# Altium PCB Проект_ЕТЗ.PcbDoc
Units mm, origin at the board's own origin, x right, y up, seen from the top; angles counter-clockwise.
Board outline 153.83 x 76 mm, 2 copper layers (Top Layer, Bottom Layer), stack 1.536 mm thick; 34 components, 54 nets, 243 pads, 185 vias.
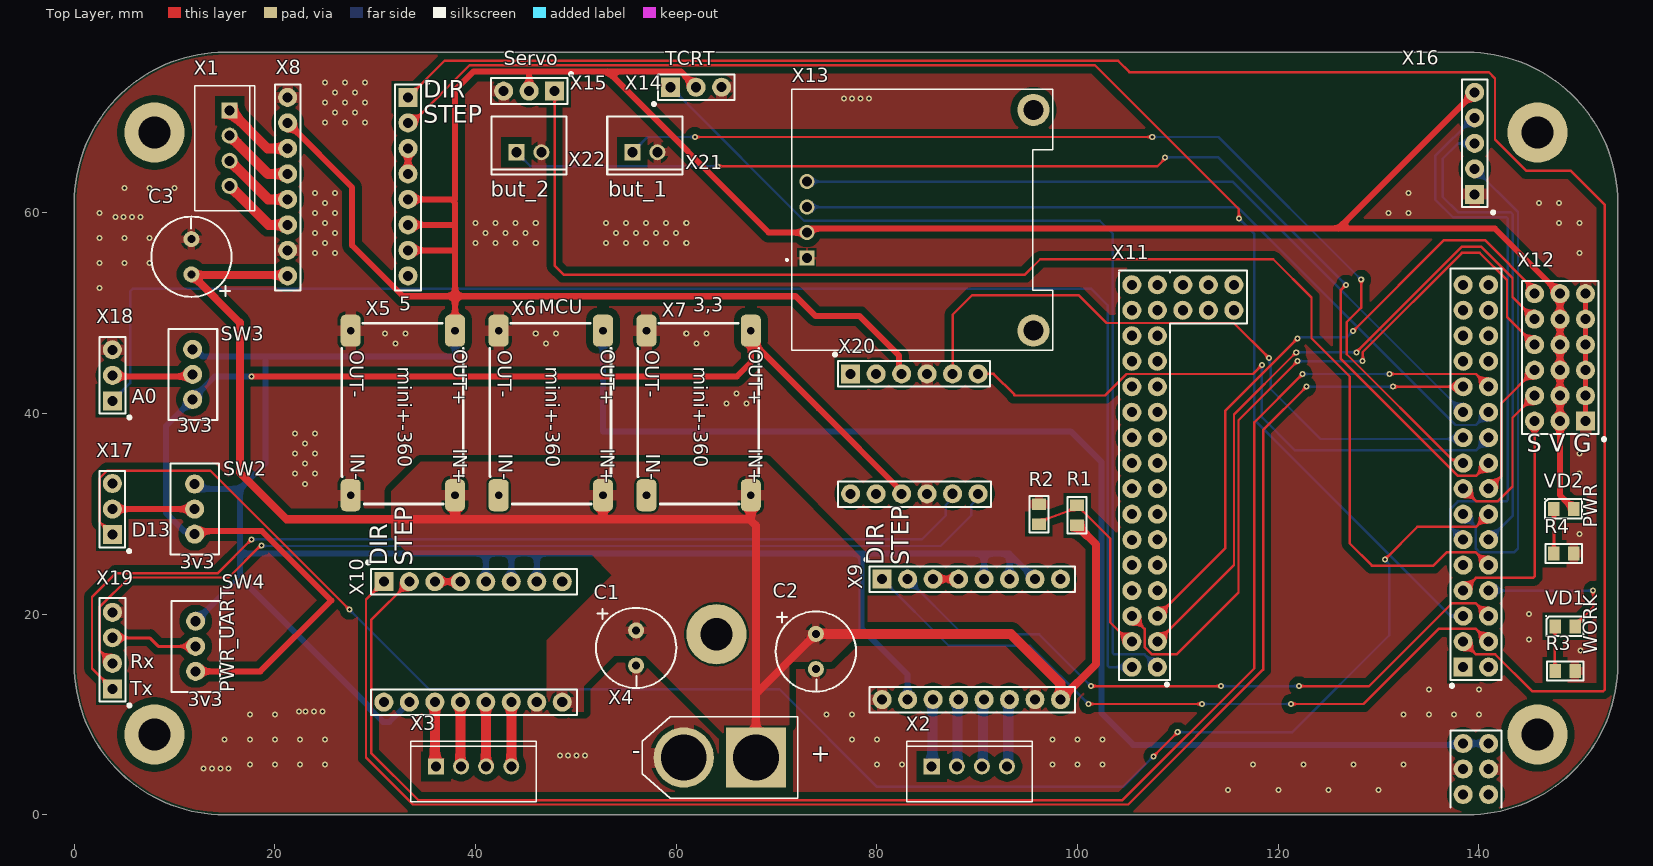
[diagram p0: Top Layer view]
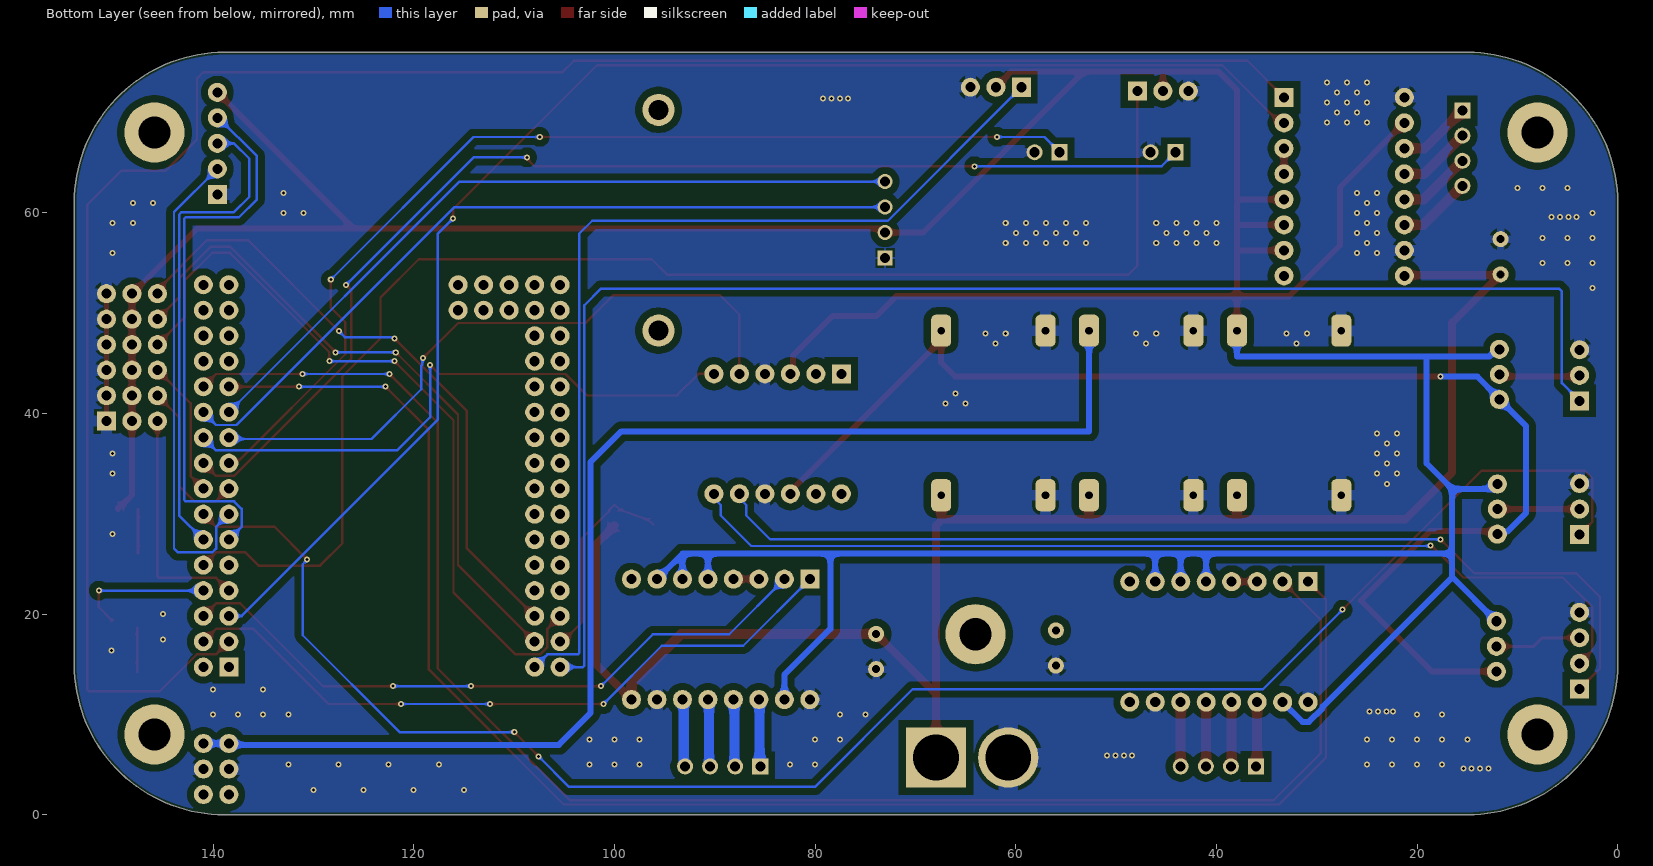
[diagram p1: Bottom Layer view, seen from below]

## Layer stack, top to bottom
Top Solder: solder mask 0.0254, SM-001, Dk 4
Top Layer: signal copper 0.018
Core: core 1.5, FR4 Tg135, Dk 4.5
Bottom Layer: signal copper 0.018
Board Layer Stack Bottom Solder: solder mask 0.0254, SM-001, Dk 4

## Board outline
15.006,0.006 cw(c15.006,15.006) 0.006,15.006 0.006,61.006 cw(c15.006,61.006) 15.006,76.006 138.834,76.006 cw(c138.834,61.006) 153.834,61.006 153.834,15.006 cw(c138.834,15.006) 138.834,0.006

## Design rules (kind name [scope] priority, off if disabled: settings)
AcuteAngle min_acute_angle [OnCopper] p1: minimum=3.50000000000000E+0001 checktracksonly=FALSE // Минимальный угол между примитивами топологии
BoardOutlineClearance board_outline_clearance_std [NOT (OnLayer('Bottom Overlay') OR OnLayer('Top Overlay'))] p1: gap=0.25 ignorepadtopadclearanceinfootprint=FALSE except(0: Arc-SplitContinuation Track-SplitContinuation SMDPad-SplitContinuation THPad-SplitContinuation Via-SplitContinuation Fill-SplitContinuation Poly-SplitContinuation Region-SplitContinuation Text-SplitContinuation) // Отступ элементов топологии от края фрезеруемой печатной платы
Clearance [InPolygonClass('TOP_GND', 'BOT_GND')] p1: gap=0.7 ignorepadtopadclearanceinfootprint=FALSE
Clearance clearance_outer_18um_std [OnTopLayer OR OnBottomLayer] p2: gap=0.2 ignorepadtopadclearanceinfootprint=TRUE // Зазоры на внешних слоях
Clearance clearance_inner_18um_std [NOT (OnTopLayer Or OnBottomLayer)] p3: gap=0.125 ignorepadtopadclearanceinfootprint=FALSE except(0.2: Arc-Fill Arc-Poly Track-Fill Track-Poly SMDPad-SMDPad SMDPad-Fill SMDPad-Poly THPad-Fill THPad-Poly Via-Fill Via-Poly Fill-Fill Fill-Poly Poly-Poly Poly-Region Poly-Text; 0.25: Arc-Hole Track-Hole SMDPad-Hole THPad-Hole Via-Hole Fill-Hole Poly-Hole Region-Hole Text-Hole) // Зазоры на внутренних слоях
ComponentClearance [All] p1: gap=0 collisioncheckmode=3 verticalgap=0 showdistances=FALSE
DiffPairsRouting diff_pairs_routing [All] p1: maxlimit=0.127 minlimit=0.127 mostfreqgap=0.127 toplayer_minwidth=0.143 toplayer_maxwidth=0.143 toplayer_prefwidth=0.143 bottomlayer_minwidth=0.143 bottomlayer_maxwidth=0.143 bottomlayer_prefwidth=0.143 impedanceprofiledriven=TRUE maxuncoupledlength=12.7 // Правила трассировки дифференциальных пар
HoleSize min_hole_size_std [IsPad] p1: absolutevalues=TRUE maxlimit=5.9 minlimit=0.6 maxpercent=80.000 minpercent=20.000 // Диаметр межслойного переходного отверстия
HoleSize min_hole_size_via_std [IsVia] p2: absolutevalues=TRUE maxlimit=5.9 minlimit=0.3 maxpercent=80.000 minpercent=20.000 // Минимальный диаметр монтажного отверстия
HoleToHoleClearance hole_to_hole_clearance_std [All] p1: gap=0.2 allowstackedmicrovias=FALSE // Минимальное расстояние между краями двух отверстий
MinimumAnnularRing min_via_ar_std [All] p1: minimumring=0.15 // Поясок площадки переходного отверстия (Annular ring VIA)
MinimumAnnularRing min_pad_ar_std [All] p2: minimumring=0.2 // Поясок монтажной контактной площадки (Annular ring PAD)
MinimumSolderMaskSliver min_solder_mask_bridge_std [All] p1: minsoldermaskwidth=0.15 // Мнимальная ширина масочного мостика
PlaneClearance plane_clearance_18um_std [All] p1: clearance=0.2 // Отступ полигона (для слоя plane) от элементов топологии
PlaneConnect [All] p1: planeconnectstyle=Relief reliefexpansion=0.5 reliefentries=4 reliefconductorwidth=0.2 reliefairgap=0.2
PolygonConnect poly_connect_to_pad<=0.3 [(AsMM(PadXSize_AllLayers)<=0.301) or (AsMM(PadYSize_AllLayers)<=0.301)] p1: thpad.connectstyle=Relief thpad.reliefconductorwidth=0.2 thpad.reliefentries=4 thpad.polygonreliefangle="90 Angle" thpad.airgapwidth=0.2 smdpad.connectstyle=Relief smdpad.reliefconductorwidth=0.2 smdpad.reliefentries=4 smdpad.polygonreliefangle="90 Angle" smdpad.airgapwidth=0.2 via.connectstyle=Direct via.reliefconductorwidth=0.254 via.reliefentries=4 via.polygonreliefangle="90 Angle" via.airgapwidth=0.254 // Правила подключения полигонов для падов от 0,3мм и меньше
PolygonConnect poly_connect_to_pad<=0.4 [(AsMM(PadXSize_AllLayers)<=0.401) or (AsMM(PadYSize_AllLayers)<=0.401)] p2: thpad.connectstyle=Relief thpad.reliefconductorwidth=0.26 thpad.reliefentries=4 thpad.polygonreliefangle="90 Angle" thpad.airgapwidth=0.2 smdpad.connectstyle=Relief smdpad.reliefconductorwidth=0.26 smdpad.reliefentries=4 smdpad.polygonreliefangle="90 Angle" smdpad.airgapwidth=0.2 via.connectstyle=Direct via.reliefconductorwidth=0.254 via.reliefentries=4 via.polygonreliefangle="90 Angle" via.airgapwidth=0.254 // Правила подключения полигонов для падов от 0,4 и меньше
PolygonConnect poly_connect_to_pad<=0.6 [(AsMM(PadXSize_AllLayers)<=0.601) or (AsMM(PadYSize_AllLayers)<=0.601)] p3: thpad.connectstyle=Relief thpad.reliefconductorwidth=0.33 thpad.reliefentries=4 thpad.polygonreliefangle="90 Angle" thpad.airgapwidth=0.2 smdpad.connectstyle=Relief smdpad.reliefconductorwidth=0.33 smdpad.reliefentries=4 smdpad.polygonreliefangle="90 Angle" smdpad.airgapwidth=0.2 via.connectstyle=Direct via.reliefconductorwidth=0.254 via.reliefentries=4 via.polygonreliefangle="90 Angle" via.airgapwidth=0.254 // Правила подключения полигонов для падов от 0,6мм и меньше
PolygonConnect poly_connect_to_pad<=0.7 [(AsMM(PadXSize_AllLayers)<=0.701) or (AsMM(PadYSize_AllLayers)<=0.701)] p4: thpad.connectstyle=Relief thpad.reliefconductorwidth=0.46 thpad.reliefentries=4 thpad.polygonreliefangle="90 Angle" thpad.airgapwidth=0.2 smdpad.connectstyle=Relief smdpad.reliefconductorwidth=0.46 smdpad.reliefentries=4 smdpad.polygonreliefangle="90 Angle" smdpad.airgapwidth=0.2 via.connectstyle=Direct via.reliefconductorwidth=0.254 via.reliefentries=4 via.polygonreliefangle="90 Angle" via.airgapwidth=0.254 // Правила подключения полигонов для падов от 0,7мм и меньше
PolygonConnect poly_connect_to_pad<=0.8 [(AsMM(PadXSize_AllLayers)<=0.8)or(AsMM(PadYSize_AllLayers)<=0.8)] p5: thpad.connectstyle=Relief thpad.reliefconductorwidth=0.53 thpad.reliefentries=4 thpad.polygonreliefangle="90 Angle" thpad.airgapwidth=0.3 smdpad.connectstyle=Relief smdpad.reliefconductorwidth=0.53 smdpad.reliefentries=4 smdpad.polygonreliefangle="90 Angle" smdpad.airgapwidth=0.2 via.connectstyle=Direct via.reliefconductorwidth=0.254 via.reliefentries=4 via.polygonreliefangle="90 Angle" via.airgapwidth=0.254 // Правила подключения полигонов для падов от 0,8мм и меньше
PolygonConnect poly_connect_to_pad<=1 [(AsMM(PadXSize_AllLayers)<=1.01)or(AsMM(PadYSize_AllLayers)<=1.01)] p6: thpad.connectstyle=Relief thpad.reliefconductorwidth=0.6 thpad.reliefentries=4 thpad.polygonreliefangle="90 Angle" thpad.airgapwidth=0.3 smdpad.connectstyle=Relief smdpad.reliefconductorwidth=0.6 smdpad.reliefentries=4 smdpad.polygonreliefangle="90 Angle" smdpad.airgapwidth=0.2 via.connectstyle=Direct via.reliefconductorwidth=0.254 via.reliefentries=4 via.polygonreliefangle="90 Angle" via.airgapwidth=0.254 // Правила подключения полигонов для падов от 1мм и меньше
PolygonConnect poly_connect_to_pad<=1.3 [(AsMM(PadXSize_AllLayers)<=1.31)or(AsMM(PadYSize_AllLayers)<=1.31)] p7: thpad.connectstyle=Relief thpad.reliefconductorwidth=0.66 thpad.reliefentries=4 thpad.polygonreliefangle="90 Angle" thpad.airgapwidth=0.3 smdpad.connectstyle=Relief smdpad.reliefconductorwidth=0.86 smdpad.reliefentries=4 smdpad.polygonreliefangle="90 Angle" smdpad.airgapwidth=0.2 via.connectstyle=Direct via.reliefconductorwidth=0.254 via.reliefentries=4 via.polygonreliefangle="90 Angle" via.airgapwidth=0.254 // Правила подключения полигонов для падов от 1,3мм и меньше
PolygonConnect poly_connect_to_pad<=1.6 [(AsMM(PadXSize_AllLayers)<=1.61)or(AsMM(PadYSize_AllLayers)<=1.61)] p8: thpad.connectstyle=Relief thpad.reliefconductorwidth=0.8 thpad.reliefentries=4 thpad.polygonreliefangle="90 Angle" thpad.airgapwidth=0.3 smdpad.connectstyle=Relief smdpad.reliefconductorwidth=1 smdpad.reliefentries=4 smdpad.polygonreliefangle="90 Angle" smdpad.airgapwidth=0.2 via.connectstyle=Direct via.reliefconductorwidth=0.254 via.reliefentries=4 via.polygonreliefangle="90 Angle" via.airgapwidth=0.254 // Правила подключения полигонов для падов от 1,6мм и меньше
PolygonConnect poly_connect_to_pad<=1.8 [(AsMM(PadXSize_AllLayers)<=1.8)or(AsMM(PadYSize_AllLayers)<=1.8)] p9: thpad.connectstyle=Relief thpad.reliefconductorwidth=1 thpad.reliefentries=4 thpad.polygonreliefangle="90 Angle" thpad.airgapwidth=0.3 smdpad.connectstyle=Relief smdpad.reliefconductorwidth=1.2 smdpad.reliefentries=4 smdpad.polygonreliefangle="90 Angle" smdpad.airgapwidth=0.2 via.connectstyle=Direct via.reliefconductorwidth=0.254 via.reliefentries=4 via.polygonreliefangle="90 Angle" via.airgapwidth=0.254 // Правила подключения полигонов для падов от 1,8мм и меньше
PolygonConnect poly_connect_to_pad<=2 [(AsMM(PadXSize_AllLayers)<=2.01)or(AsMM(PadYSize_AllLayers)<=2.01)] p10: thpad.connectstyle=Relief thpad.reliefconductorwidth=1.1 thpad.reliefentries=4 thpad.polygonreliefangle="90 Angle" thpad.airgapwidth=0.3 smdpad.connectstyle=Relief smdpad.reliefconductorwidth=1.4 smdpad.reliefentries=4 smdpad.polygonreliefangle="90 Angle" smdpad.airgapwidth=0.2 via.connectstyle=Direct via.reliefconductorwidth=0.254 via.reliefentries=4 via.polygonreliefangle="90 Angle" via.airgapwidth=0.254 // Правила подключения полигонов для падов от 2мм и меньше
PolygonConnect poly_connect_to_pad<=2.3 [(AsMM(PadXSize_AllLayers)<=2.31)or(AsMM(PadYSize_AllLayers)<=2.31)] p11: thpad.connectstyle=Relief thpad.reliefconductorwidth=1.2 thpad.reliefentries=4 thpad.polygonreliefangle="90 Angle" thpad.airgapwidth=0.3 smdpad.connectstyle=Relief smdpad.reliefconductorwidth=1.4 smdpad.reliefentries=4 smdpad.polygonreliefangle="90 Angle" smdpad.airgapwidth=0.2 via.connectstyle=Direct via.reliefconductorwidth=0.254 via.reliefentries=4 via.polygonreliefangle="90 Angle" via.airgapwidth=0.254 // Правила подключения полигонов для падов от 2,3мм и меньше
PolygonConnect poly_connect_to_pad<=2.5 [(AsMM(PadXSize_AllLayers)<=2.51)or(AsMM(PadYSize_AllLayers)<=2.51)] p12: thpad.connectstyle=Relief thpad.reliefconductorwidth=1.2 thpad.reliefentries=4 thpad.polygonreliefangle="90 Angle" thpad.airgapwidth=0.3 smdpad.connectstyle=Relief smdpad.reliefconductorwidth=1.4 smdpad.reliefentries=4 smdpad.polygonreliefangle="90 Angle" smdpad.airgapwidth=0.2 via.connectstyle=Direct via.reliefconductorwidth=0.254 via.reliefentries=4 via.polygonreliefangle="90 Angle" via.airgapwidth=0.254 // Правила подключения полигонов для падов от 2,5мм и меньше
PolygonConnect poly_connect_to_pad<=2.7 [(AsMM(PadXSize_AllLayers)<=2.71)or(AsMM(PadYSize_AllLayers)<=2.71)] p13: thpad.connectstyle=Relief thpad.reliefconductorwidth=1.4 thpad.reliefentries=4 thpad.polygonreliefangle="90 Angle" thpad.airgapwidth=0.3 smdpad.connectstyle=Relief smdpad.reliefconductorwidth=1.6 smdpad.reliefentries=4 smdpad.polygonreliefangle="90 Angle" smdpad.airgapwidth=0.2 via.connectstyle=Direct via.reliefconductorwidth=0.254 via.reliefentries=4 via.polygonreliefangle="90 Angle" via.airgapwidth=0.254 // Правила подключения полигонов для падов от 2,7мм и меньше
PolygonConnect poly_connect_to_pad<=3 [(AsMM(PadXSize_AllLayers)<=3.01)or(AsMM(PadYSize_AllLayers)<=3.01)] p14: thpad.connectstyle=Relief thpad.reliefconductorwidth=1.6 thpad.reliefentries=4 thpad.polygonreliefangle="90 Angle" thpad.airgapwidth=0.3 smdpad.connectstyle=Relief smdpad.reliefconductorwidth=1.8 smdpad.reliefentries=4 smdpad.polygonreliefangle="90 Angle" smdpad.airgapwidth=0.2 via.connectstyle=Direct via.reliefconductorwidth=0.254 via.reliefentries=4 via.polygonreliefangle="90 Angle" via.airgapwidth=0.254 // Правила подключения полигонов для падов от 3мм и меньше
PolygonConnect poly_connect_to_pad<=7 [(AsMM(PadXSize_AllLayers)<7.01)or(AsMM(PadYSize_AllLayers)<=7.01)] p15: thpad.connectstyle=Relief thpad.reliefconductorwidth=2 thpad.reliefentries=4 thpad.polygonreliefangle="90 Angle" thpad.airgapwidth=0.4 smdpad.connectstyle=Relief smdpad.reliefconductorwidth=2 smdpad.reliefentries=4 smdpad.polygonreliefangle="90 Angle" smdpad.airgapwidth=0.3 via.connectstyle=Direct via.reliefconductorwidth=0.254 via.reliefentries=4 via.polygonreliefangle="90 Angle" via.airgapwidth=0.254 // Правила подключения полигонов для падов от 7мм и меньше
PolygonConnect poly_connect_to_pad [All] p16: thpad.connectstyle=Relief thpad.reliefconductorwidth=0.25 thpad.reliefentries=4 thpad.polygonreliefangle="90 Angle" thpad.airgapwidth=0.2 smdpad.connectstyle=Relief smdpad.reliefconductorwidth=0.25 smdpad.reliefentries=4 smdpad.polygonreliefangle="90 Angle" smdpad.airgapwidth=0.2 via.connectstyle=Direct via.reliefconductorwidth=0.25 via.reliefentries=4 via.polygonreliefangle="90 Angle" via.airgapwidth=0.2 // Правила подключения полигонов общие
RoutingCorners [All] p1 off: cornerstyle=45-Degree minsetback=2.5 maxsetback=2.5
RoutingVias [All] p1: holewidth=0.3 width=0.6 viastyle="Through Hole" minholewidth=0.3 minwidth=0.6 maxholewidth=5.9 maxwidth=6.4
SilkToSilkClearance silk_to_silk_clearance_std [All] p1 off: silktosilkclearance=0.15 // Отступ текста шелкографии от других примитивов шелкографии
SilkToSolderMaskClearance silk_to_solder_mask_clearance_std [IsPad] p1 off: minsilkscreentomaskgap=0.15 clearancetoexposedcopper=FALSE // Минимальное расстояние между элементами шелкографии и вскрытой медью
SolderMaskExpansion solder_mask_expansion_std [All] p1: expansion=0.05 istentingtop=FALSE // Припуск паяльной масски
SupplyNets "Schematic Supply Nets_5" [InNet('+3,3В')] p1: voltage=0.000
SupplyNets "Schematic Supply Nets_4" [InNet('+5В_MCU')] p2: voltage=0.000
SupplyNets "Schematic Supply Nets_2" [InNet('+5В')] p3: voltage=0.000
SupplyNets "Schematic Supply Nets_1" [InNet('GND')] p4: voltage=0.000
SupplyNets "Schematic Supply Nets" [InNet('VCC')] p5: voltage=0.000
UnRoutedNet [All] p1: checkbadconnections=TRUE
Width width_18um_std [All] p1: maxlimit=10 minlimit=0.125 preferedwidth=0.15 checkconnectedcopper=TRUE // Ширина проводников (общая)
19 further rules are at their usual default settings.

## Classes and differential pairs
polygon class TOP_GND: BOT_GND TOP_GND

## Components (designator, comment, footprint, x,y, rotation, side; value= is the part's Value field where it differs from the comment)
C1 "am" SK050M0100B3F-0811-UP 56.007,16.637 r90 top
C2 "am" SK050M0100B3F-0811-UP 73.914,16.284 r90 top
C3 "am" SK050M0100B3F-0811-UP 11.684,55.626 r270 top
R1 "1,2к" Resistor0805 99.949,29.845 r90 top
R2 "4,75к" Resistor0805 96.139,29.972 r90 top
R3 "220" Resistor0805 148.59,14.351 r0 top
R4 "220" Resistor0805 148.463,26.035 r0 top
SW2 "кнопка_S" SS-12D00G3 12.002,30.48 r90 top
SW3 "кнопка_S" SS-12D00G3 11.811,43.902 r90 top locked
SW4 "кнопка_S" SS-12D00G3 12.1,16.8 r90 top
VD1 "LED0805" LED0805 148.603,18.796 r0 top
VD2 "LED0805" LED0805 148.463,30.48 r0 top
X1 "DS1069-4M (CWF-4)" CWF-4 15.494,70.191 r0 top
X2 "DS1069-4M (CWF-4)" CWF-4 85.464,4.826 r90 top
X3 "DS1069-4M (CWF-4)" CWF-4 36.061,4.826 r90 top
X4 "XT60-M" AMASS_XT60-M 64.345,5.715 r180 top
X5 "mini-360" MINI360 37.959,48.26 r270 top
X6 "mini-360" MINI360 52.698,48.26 r270 top
X7 "mini-360" MINI360 67.437,48.26 r270 top
X8 "A4988" A4988 33.269,68.966 r270 top
X9 "A4988" A4988 83.058,23.495 r0 top
X10 "A4988" A4988 33.401,23.241 r0 top
X11 "Arduino Mega 2560 Pro" PBD38 106.68,17.272 r90 top
X12 "PLS-2.54-3*6" PLS-2.54-3*6 145.542,39.243 r90 top
X13 "PLS-2.54-4" "oled 128x64 0.96inch" 97.631,46.303 r90 top
X14 "PLS-2.54-3" PLS-2.54-3 61.976,72.517 r0 top
X15 "PLS-2.54-3" PLS-2.54-3 45.339,72.141 r180 top
X16 "PLS-2.54-5" KY-040 139.573,68.199 r90 top
X17 "PLS-2.54-3" PLS-2.54-3 3.81,30.48 r90 top
X18 "PLS-2.54-3" PLS-2.54-3 3.815,43.81 r90 top
X19 "PLS-2.54-4" PLS-2.54-4 3.815,15.108 r90 top
X20 "LOGIC CONVENTTOR" "LOGIC CONVENTOR" 79.92,43.95 r0 top
X21 "DS1069-2M (CWF-2)" CWF-2 56.876,66.715 r0 top
X22 "DS1069-2M (CWF-2)" CWF-2 45.319,66.715 r0 top

## Footprints (in the part's own frame and the unit in brackets; to place one, negate y for a bottom-side part, rotate by r counter-clockwise, add the part's x,y. Pads: shape width x height; smd on the part's side, far side on the other; paste and mask are expansions set on the pad)
A4988 [mm]
  rect 1.9x1.9 hole 1: 1(-2.54,0)
  round 1.9 hole 1: 2(0,0) 3(2.545,0.005) 4(5.08,0) 5(7.62,0) 6(10.16,0) 7(12.7,0) 8(15.24,0) 9(-2.54,-12) 10(0,-12) 11(2.545,-11.995) 12(5.08,-12) 13(7.62,-12) 14(10.16,-12) 15(12.7,-12) 16(15.24,-12)
  silkscreen extent -4.1,-13.28 16.7,1.94, body extent -3.8,-13.55 16.67,1.45, height 15.6
AMASS_XT60-M [mm]
  rect 6x6 / inner round 6 / far side rect 6x6 hole 4.55: 1(-3.6,0)
  round 6 hole 4.55: 2(3.6,0)
  silkscreen extent -7.75,-4.05 7.75,4.05, body extent -7.75,-4.05 7.75,4.05, height 16
CWF-2 [mm]
  rect 1.6x1.6 hole 1: 1(-1.25,-0.675)
  round 1.6 hole 1: 2(1.25,-0.675)
  silkscreen extent -3.75,-2.88 3.75,2.88, body extent -3.75,-2.87 3.75,2.88, height 7
CWF-4 [mm]
  rect 1.6x1.6 hole 1: 1(0,0)
  round 1.6 hole 1: 2(0,-2.5) 3(0,-5) 4(0,-7.5)
  silkscreen extent -3.5,-10 2.5,2.5, body extent -3.55,-9.95 2.2,2.45, height 7
KY-040 [mm]
  round 1.9 hole 1 mask+0.102: 1(3.81,0) 2(1.27,0)
  round 1.9 hole 1: 3(-1.27,0) 4(-3.81,0)
  rect 1.9x1.9 hole 1: 5(-6.35,0)
  silkscreen extent -8.16,-1.85 5.1,1.27, body extent -7.57,-1.27 7.67,7.35, height 5.45
LED0805 [mm]
  rect 1.15x1.4 smd: 1(-1,0) 2(1,0)
  silkscreen extent -1.9,-0.95 1.82,1.03, body extent -1.01,-0.65 1.01,0.6, height 1.1
"LOGIC CONVENTOR" [mm]
  rect 1.9x1.9 hole 1: 1(-2.54,0)
  round 1.9 hole 1: 2(0,0) 3(2.545,0.005) 4(5.08,0) 5(7.62,0) 6(10.16,0) 7(-2.54,-11.95) 8(0,-11.95) 9(2.545,-11.95) 10(5.08,-11.95) 11(7.62,-11.945) 12(10.16,-11.95)
  silkscreen extent -4.1,-13.28 11.48,1.94, body extent -3.75,-13.25 11.49,1.27, height 8.5
MINI360 [mm]
  rrect50% 3.2x2 hole 0.762: 1(0,0) 2(0,-10.4) 3(16.4,0) 4(16.4,-10.4)
  silkscreen extent -0.75,-11.27 17.27,0.8, body extent -0.73,-11.23 17.27,0.77, height 3.75
"oled 128x64 0.96inch" [mm]
  round 1.508 hole 1: 1(16.816,24.606) 2(14.276,24.606) 3(11.736,24.606)
  rect 1.508x1.508 / inner round 1.508 / far side rect 1.508x1.508 hole 1: 4(9.196,24.606)
  silkscreen extent 0.01,0.11 26.01,26.71, body extent 0.01,0.11 26.01,26.11, height 5.66
PBD38 [mm]
  rect 1.9x1.9 hole 1: 1(-2.54,-31.75)
  round 1.9 hole 1: 2(-2.54,-34.29) 3(0,-31.75) 7(5.08,-31.75) 8(5.08,-34.29) 13(12.7,-31.75) 14(12.7,-34.29) 19(20.32,-31.75) 20(20.32,-34.29) 25(27.94,-31.75) 26(27.94,-34.29) 31(35.56,-31.75) 32(35.56,-34.29) 33(17.78,1.27) 34(17.78,-1.27) 35(20.32,1.27) 39(25.4,1.27) 40(25.4,-1.27) 45(33.02,1.27) 46(33.02,-1.27) 51(35.56,-6.35) 52(33.02,-6.35) 57(0,1.27) 58(0,-1.27) 63(7.62,1.27) 64(7.62,-1.27) 69(15.24,1.27) 70(15.24,-1.27) 71(-15.24,-34.285) 72(-15.24,-31.745) 73(-12.7,-34.285)
  round 1.9 hole 1 mask+0.102: 4(0,-34.29) 5(2.54,-31.75) 6(2.54,-34.29) 9(7.62,-31.75) 10(7.62,-34.29) 11(10.16,-31.75) 12(10.16,-34.29) 15(15.24,-31.75) 16(15.24,-34.29) 17(17.78,-31.75) 18(17.78,-34.29) 21(22.86,-31.75) 22(22.86,-34.29) 23(25.4,-31.75) 24(25.4,-34.29) 27(30.48,-31.75) 28(30.48,-34.29) 29(33.02,-31.75) 30(33.02,-34.29) 36(20.32,-1.27) 37(22.86,1.27) 38(22.86,-1.27) 41(27.94,1.27) 42(27.94,-1.27) 43(30.48,1.27) 44(30.48,-1.27) 47(35.56,1.27) 48(35.56,-1.27) 49(35.56,-3.81) 50(33.02,-3.81) 53(35.56,-8.89) 54(33.02,-8.89) 55(-2.54,1.27) 56(-2.54,-1.27) 59(2.54,1.27) 60(2.54,-1.27) 61(5.08,1.27) 62(5.08,-1.27) 65(10.146,1.257) 66(10.16,-1.27) 67(12.7,1.27) 68(12.7,-1.27) 74(-12.7,-31.745) 75(-10.16,-34.285) 76(-10.16,-31.745)
  silkscreen extent -16.52,-35.57 37.2,2.54, body extent -17.18,-35.6 36.94,2.5, height 13.94
PLS-2.54-3 [mm]
  rect 1.9x1.9 hole 1: 1(-2.54,0)
  round 1.9 hole 1: 2(0,0) 3(2.545,0.005)
  silkscreen extent -4.2,-1.68 3.81,1.27, body extent -3.81,-1.27 3.81,1.27, height 8.59
PLS-2.54-3*6 [mm]
  rect 1.9x1.9 hole 1: 1(0,-5.08)
  round 1.9 hole 1: 2(2.54,-5.08) 3(5.08,-5.08) 4(7.62,-5.08) 5(10.16,-5.08) 6(12.7,-5.08) 7(0,-2.54) 8(2.54,-2.54) 9(5.08,-2.54) 10(7.62,-2.54) 11(10.16,-2.54) 12(12.7,-2.54) 13(0,0) 14(2.54,0) 15(5.08,0) 16(10.16,0) 17(7.62,0) 18(12.7,0)
  silkscreen extent -1.81,-6.93 13.97,1.27, body extent -1.26,-6.35 13.98,1.27, height 8.54
PLS-2.54-4 [mm]
  rect 1.9x1.9 hole 1: 1(-2.54,0)
  round 1.9 hole 1: 2(0,0) 3(2.545,0.005) 4(5.08,0)
  silkscreen extent -4.2,-1.68 6.5,1.27, body extent -3.79,-1.37 6.37,1.17, height 8.6
Resistor0805 [mm]
  rect 1.15x1.4 smd: 1(-1,0) 2(1,0)
  silkscreen extent -1.82,-0.95 1.82,0.95, body extent -1.1,-0.7 1.1,0.7, height 0.45
SK050M0100B3F-0811-UP [mm]
  round 1.6 hole 0.8: 1(-1.75,0) 2(1.75,0)
  silkscreen extent -4,-4 4,4, body extent -4,-3.99 4,3.99, height 11.5
SS-12D00G3 [mm]
  round 1.9 hole 1: 1(-2.5,0) 2(0,0)
  round 1.9 hole 1 mask+0.102: 3(2.5,0)
  silkscreen extent -4.54,-2.45 4.53,2.42, body extent -4.31,-1.85 4.31,2, height 7.45

## Part data
C1 C2 C3: library part CAPATION+470мк35В, voltage=35В, nam=конденсатор, nominal=100мк
R1 R2 R3 R4: library part RESISTOR, nam=резистор
SW2 SW3 SW4: library part BT992895, "крутые переключатели с бимов", nam=кнопка_S
X1 X2 X3: library part CWF-4, "Разъем - 4 конт. прямая вилка на плату", Contact_1=1B, Contact_2=1A, Contact_3=2A, Contact_4=2B, Name="DS1069-4M (CWF-4)"
X4: "Plug; DC supply; XT60; male; PIN: 2; for cable; soldered; 30A; 500V", Package=Package, Check_prices=https://www.snapeda.com/parts/XT60-M/AMASS/view-part/?ref=eda, Contact_1=+4S, Contact_2=GND, MF=AMASS, MP=XT60-M, SnapEDA_Link=https://www.snapeda.com/parts/XT60-M/AMASS/view-part/?ref=snap
X5 X6 X7: library part mini360, "стаб 18 на 12 мм"
X16: library part Ky-040
X21 X22: library part CWF-2, "Разъем - 2 конт. прямая вилка на плату", Contact_1=Contact_1, Contact_2=Contact_2, Name="DS1069-2M (CWF-2)"
X11: nam="Arduino Mega 2560 Pro"
X12: Contact_1=GND, Contact_2=GND, Contact_3=GND, Contact_4=GND, Contact_5=GND, Contact_6=GND, Contact_7=VCC, Contact_8=VCC, Contact_9=VCC, Contact_10=VCC, Contact_11=VCC, Contact_12=VCC, Contact_13=D1, Contact_14=D2, Contact_15=D3, Contact_16=A1, Contact_17=A2, Contact_18=A3
X13: Contact_1=SDA, Contact_2=SCL, Contact_3=VCC, Contact_4=GND
X14 X15 X17 X18: Contact_1=S, Contact_2=VCC, Contact_3=GND, nam="для датчиков"
X19: Contact_1=TX, Contact_2=RX, Contact_3=VCC, Contact_4=GND

## Free pads (board coordinates)
  round 6 hole 3.2: 2(8.006,8.006) 2(8.006,68.006) 2(64.006,18.006) 2(145.834,8.006) 2(145.834,68.006)
  round 3.2 hole 2: 2(95.599,48.263) 2(95.599,70.263)

## Via types
v1: diameter 0.6, hole 0.3, Top Layer to Bottom Layer, tented both sides, 185 vias

## Nets (pads, with @x,y where several pads share a name; then routed paths per layer and width w, separated by ;. In a path a pad name is that pad's centre, name@x,y a point inside that pad or via, vN(x,y) a via of type N, cw(c..) or ccw(c..) an arc to the next point about the centre after c; other vN are vias at no path point)
+3,3В: SW2.1 SW3.1 SW4.1 X7.1 X20.9 | length 130.6
  Top Layer w0.6: SW4.1 18.554,14.3 25.622,21.368 18.72,28.27 SW2.1@12.212,28.27 ; v1(17.653,43.688) 66.04,43.688 67.437,45.085 X7.1@67.437,47.263 ; X7.1 X7.1@67.437,47.263 ; X20.9@82.417,32.283 74.185,40.515 68.014,46.686 68.014,46.975 67.726,47.263 X7.1@67.437,47.263
  Bottom Layer w0.6: SW2.1 11.753,28.229 11.014,28.229 9.144,30.099 9.144,38.75 12.002,41.607 12.002,41.688 14.001,43.688 v1(17.653,43.688)
+5В: SW2.3 SW3.3 SW4.3 VD2.2 X5.1 X8.5 X8.6 X8.7 X8.10 X9.5 X9.6 X9.7 X9.10 X10.5 X10.6 X10.7 X10.10 X12.7 X12.8 X12.9 X12.10 X12.11 X12.12 X13.3 X14.2 X15.2 X16.1 X20.3 | length 483.2
  Top Layer w0.6: X8.10 27.686,62.549 27.686,56.769 32.766,51.689 37.959,51.689 ; X8.7 37.837,56.266 37.959,56.388 ; X8.6 37.954,58.806 37.959,58.801 ; X8.5 37.602,61.346 ; X5.1 37.959,51.689 ; X15.2@45.339,72.644 45.339,73.893 ; X14.2 60.886,73.607 60.886,73.674 60.466,74.094 53.16,74.094 ; X20.3 82.216,44.204 82.216,45.759 78.275,49.7 73.893,49.7 71.904,51.689 37.959,51.689 ; X16.1 125.984,58.42 ; VD2.2 149.463,30.605 149.188,30.88 149.063,30.88 148.082,31.861 X12.7 X12.8 X12.9 X12.10 X12.11 X12.12 141.605,58.42 125.984,58.42 ; 37.602,61.346 37.959,60.99 37.959,58.801 ; 37.602,61.346 37.973,61.346 37.973,72.263 39.804,74.094 53.16,74.094 ; 37.959,51.689 37.959,56.388 ; 37.959,56.388 37.959,58.801 ; 53.16,74.094 69.215,58.039 X13.3 73.271,58.039 73.652,58.42 125.984,58.42
  Bottom Layer w0.6: SW3.3 12.098,46.402 12.812,45.688 37.959,45.688 ; SW2.3@12.002,32.48 16.51,32.48 ; SW4.3 16.51,23.71 16.51,26.035 ; 16.51,23.684 29.411,10.783 29.411,10.64 30.786,9.266 31.426,9.266 X10.10 ; 19.05,45.628 19.05,35.02 16.51,32.48 ; 37.959,45.748 X5.1 ; X10.5 41.021,26.035 ; X10.6 43.561,26.035 ; X10.7 46.101,26.035 ; X9.10 83.058,13.97 78.486,18.542 78.486,26.035 ; X9.5 90.678,26.035 ; X9.6 93.218,26.035 ; X9.7 93.218,26.035 ; 16.51,26.035 41.021,26.035 ; 16.51,26.035 16.51,32.48 ; 41.021,26.035 43.561,26.035 ; 43.561,26.035 46.101,26.035 ; 46.101,26.035 78.486,26.035 ; 78.486,26.035 90.678,26.035 ; 90.678,26.035 93.218,26.035
+5В_MCU: X6.1 X11.75 X11.76 | length 126
  Bottom Layer w0.6: X6.1 52.698,38.227 99.314,38.227 102.362,35.179 102.362,10.16 105.537,6.985 138.425,6.985 X11.76 X11.75
Analog: X11.55 X18.1 | length 148.2
  Bottom Layer w0.24: X18.1 5.574,43.029 5.574,52.17 5.856,52.451 101.343,52.451 102.997,50.797 102.997,14.873 103.138,14.732 X11.55
BATTERY_VOLTAGE: R1.2 R2.1 X11.57 | length 20.4
  Top Layer w0.24: R2.1 96.719,29.427 99.369,30.39 R1.2 100.074,30.845 100.529,30.39 100.529,30.265 103.251,27.543 103.251,19.177 105.156,17.272 X11.57
But1: X11.17 X21.1 | length 103.3
  Top Layer w0.24: v1(61.849,67.564) v1(107.442,67.564) ; v1(128.27,53.34) 128.27,50.555 126.831,49.115 126.831,45.902 137.369,35.363 138.119,35.363 X11.17
  Bottom Layer w0.24: X21.1 57.15,67.564 v1(61.849,67.564) ; v1(107.442,67.564) 114.046,67.564 v1(128.27,53.34)
But2: X11.18 X22.1 | length 116.7
  Top Layer w0.24: v1(64.135,64.643) 107.95,64.643 v1@108.839,65.532 ; v1(126.746,52.832) 126.238,52.324 126.238,45.448 137.904,33.782 139.7,33.782 X11.18
  Bottom Layer w0.24: X22.1 45.466,64.643 v1(64.135,64.643) ; v1(108.712,65.532) 114.046,65.532 v1@126.714,52.864
Digital: X11.14 X17.1 | length 174.2
  Top Layer w0.24: X17.1 2.535,29.215 2.535,33.551 3.279,34.295 13.584,34.295 v1(27.432,20.447) ; v1(107.569,5.842) v1(109.982,8.255) ; v1(130.626,25.47) 133.858,28.702 139.7,28.702 X11.14
  Bottom Layer w0.24: v1(27.432,20.447) 35.363,12.516 70.288,12.516 80.01,2.794 104.521,2.794 v1(107.569,5.842) ; v1(109.982,8.255) 121.412,8.255 131.064,17.907 131.064,24.975 130.626,25.413 v1(130.626,25.47)
Dir1: X8.1 X11.3 | length 194.8
  Top Layer w0.24: X8.1 36.917,75.154 104.043,75.154 105.17,74.027 140.984,74.027 141.605,73.406 141.605,67.31 144.728,64.187 149.173,64.187 152.527,60.833 152.527,12.476 152.386,12.335 145.288,12.335 141.621,16.002 139.7,16.002 X11.3
Dir2: X9.1 X11.4 | length 69.2
  Top Layer w0.24: v1(101.092,11.049) v1(112.395,11.049) ; v1(121.285,11.049) 128.493,11.049 135.986,18.542 139.7,18.542 X11.4
  Bottom Layer w0.24: X9.1 87.156,16.857 95.284,16.857 v1(101.092,11.049) ; v1(112.395,11.049) v1(121.285,11.049)
Dir3: X10.1 X11.23 | length 160.8
  Top Layer w0.24: X10.1 29.083,21.463 29.083,5.715 33.766,1.032 105.045,1.032 118.491,14.478 118.491,38.354 v1(122.809,42.672) ; v1(131.445,42.672) X11.23
  Bottom Layer w0.24: v1(122.809,42.672) v1(131.445,42.672)
DRV1_1A: X1.2 X8.12 | length 7.4
  Top Layer w1: X1.2 19.299,63.886 X8.12
DRV1_1B: X1.1 X8.11 | length 7.3
  Top Layer w1: X1.1 19.264,66.421 X8.11
DRV1_2A: X1.3 X8.13 | length 7.4
  Top Layer w1: X1.3 19.339,61.346 X8.13
DRV1_2B: X1.4 X8.14 | length 7.4
  Top Layer w1: X1.4 19.379,58.806 X8.14
DRV2_1A: X2.2 X9.12 | length 6.7
  Bottom Layer w0.6: X2.2 X2.2@88.051,4.913 ; X9.12@88.051,11.408 X9.12
  Bottom Layer w1: X2.2@88.051,4.913 X9.12@88.051,11.408
DRV2_1B: X2.1 X9.11 | length 6.7
  Bottom Layer w0.6: X2.1 X2.1@85.534,4.896 ; X9.11@85.534,11.431 X9.11
  Bottom Layer w1: X2.1@85.534,4.896 X9.11@85.534,11.431
DRV2_2A: X2.3 X9.13 | length 6.8
  Bottom Layer w0.6: X2.3 X2.3@90.571,4.933 ; X9.13@90.571,11.388 X9.13
  Bottom Layer w1: X2.3@90.571,4.933 X9.13@90.571,11.388
DRV2_2B: X2.4 X9.14 | length 6.8
  Bottom Layer w0.6: X2.4 X2.4@93.091,4.953 ; X9.14@93.091,11.368 X9.14
  Bottom Layer w1: X2.4@93.091,4.953 X9.14@93.091,11.368
DRV3_1A: X3.2 X10.12 | length 6.6
  Top Layer w0.6: X3.2@38.481,5.605 38.989,5.097 X3.2@38.989,4.826
  Top Layer w1: X3.2@38.481,5.605 X10.12
DRV3_1B: X3.1 X10.11 | length 6.6
  Top Layer w0.6: X3.1@35.946,5.369 X3.1@36.489,4.826
  Top Layer w1: X3.1@35.946,5.369 X10.11
DRV3_2A: X3.3 X10.13 | length 6.6
  Top Layer w0.6: X3.3@41.021,5.565 41.489,5.097 X3.3@41.489,4.826
  Top Layer w1: X3.3@41.021,5.565 X10.13
DRV3_2B: X3.4 X10.14 | length 6.6
  Top Layer w0.6: X3.4@43.561,5.525 43.989,5.097 X3.4@43.989,4.826
  Top Layer w1: X3.4@43.561,5.525 X10.14
Extra_1: X11.7 X12.13 | length 23.2
  Top Layer w0.24: X11.7 139.7,23.622 145.401,23.622 145.542,23.763 X12.13
Extra_2: X11.15 X12.14 | length 16
  Top Layer w0.24: X11.15 138.473,32.512 139.743,31.242 141.859,31.242 143.345,32.728 143.345,39.586 X12.14
Extra_3: X11.16 X12.15 | length 13.7
  Top Layer w0.24: X11.16 142.24,33.782 142.24,41.021 X12.15
Extra_4: X11.58 X12.16 | length 66.8
  Top Layer w0.24: X11.58 115.593,24.915 115.593,39.901 v1(121.793,46.101) ; v1(127.806,46.101) 127.806,46.145 138.303,56.642 140.208,56.642 143.345,53.505 143.345,51.6 X12.16
  Bottom Layer w0.24: v1(121.793,46.101) v1(127.806,46.101)
Extra_5: X11.59 X12.17 | length 75.8
  Top Layer w0.24: X11.59 106.68,18.542 106.68,16.746 107.424,16.002 109.855,16.002 116.033,22.18 116.033,39.325 v1(121.92,45.212) ; v1(128.397,45.212) 128.426,45.241 128.426,46.13 138.303,56.007 140.081,56.007 142.793,53.295 142.793,49.612 X12.17
  Bottom Layer w0.24: v1(121.92,45.212) v1(128.397,45.212)
Extra_6: X11.60 X12.18 | length 63.6
  Top Layer w0.25: X11.60 114.724,26.586 114.724,40.302 v1(121.92,47.498) ; v1(127.451,48.203) 136.525,57.277 140.589,57.277 145.542,52.324 X12.18
  Bottom Layer w0.25: v1(121.92,47.498) 121.987,47.565 122.181,47.565 122.241,47.625 126.873,47.625 v1(127.451,48.203)
GND: C1.1 C2.1 C3.1 R2.2 R3.2 R4.2 X4.2 X5.2 X5.4 X6.2 X6.4 X7.2 X7.4 X8.9 X8.15 X9.9 X9.15 X10.9 X10.15 X11.73 X11.74 X12.1 X12.2 X12.3 X12.4 X12.5 X12.6 X13.4 X14.3 X15.3 X16.5 X17.3 X18.3 X19.4 X20.4 X20.10 X21.2 X22.2 | length 12.7
  Top Layer w0.5: X12.1 X12.6
  other v1: 115,2.5 120,2.5 125,2.5 130,2.5 12.9,4.6 13.733,4.6 14.566,4.6 15.399,4.6 17.5,5 20,5 22.5,5 25,5 80,5 82.5,5 97.5,5 100,5 102.5,5 117.5,5 122.5,5 127.5,5 132.5,5 48.4,5.9 49.233,5.9 50.066,5.9 50.899,5.9 15,7.5 17.5,7.5 20,7.5 22.5,7.5 25,7.5 77.5,7.5 80,7.5 97.5,7.5 100,7.5 102.5,7.5 17.5,10 20,10 75,10 77.5,10 132.5,10 135,10 137.5,10 140,10 22.4,10.3 23.067,10.318 23.9,10.318 24.733,10.318 135,12.5 140,12.5 150.114,16.383 145,17.5 145,20 150,28 23,33 22,34 24,34 150,34 23,35 22,36 24,36 150,36 23,37 22,38 24,38 65,41 67,41 66,42 32,47 47,47 62,47 31,48 33,48 46,48 48,48 61,48 63,48 2.5,52.5 2.5,55 5,55 7.5,55 24,56 26,56 150,56 25,57 40,57 42,57 44,57 46,57 53,57 55,57 57,57 59,57 61,57 2.5,57.5 5,57.5 7.5,57.5 24,58 26,58 41,58 43,58 45,58 54,58 56,58 58,58 60,58 25,59 40,59 42,59 44,59 46,59 53,59 55,59 57,59 59,59 61,59 148,59 150,59 4.1,59.6 4.933,59.6 5.766,59.6 6.599,59.6 2.5,60 24,60 26,60 131,60 133,60 25,61 146,61 148,61 24,62 26,62 133,62 5,62.5 7.5,62.5 10,62.5 25,69 27,69 29,69 26,70 28,70 25,71 27,71 29,71 76.7,71.4 77.533,71.4 78.366,71.4 79.199,71.4 26,72 28,72 25,73 27,73 29,73
LED_Work: VD1.2 X11.8 | length 14
  Top Layer w0.24: VD1.2@150.033,19.351 VD1.2@150.058,19.376 ; VD1.2@150.059,19.376 151.384,20.701 v1(151.384,22.352)
  Bottom Layer w0.24: X11.8 v1(151.384,22.352)
NetR3_1: R3.1 VD1.1 | length 4.4
  Top Layer w0.24: R3.1@147.574,14.207 VD1.1@147.574,18.652
NetR4_1: R4.1 VD2.1 | length 4.4
  Top Layer w0.3: R4.1 VD2.1
NetSW2_2: SW2.2 X17.2 | length 8.2
  Top Layer w0.6: X17.2 SW2.2
NetSW3_2: SW3.2 X18.2 | length 8.3
  Top Layer w0.6: X18.2 3.815,43.688 SW3.2@12.002,43.688
NetSW4_2: SW4.2 X19.3 | length 8.6
  Top Layer w0.3: X19.3 7.529,17.653 8.382,16.8 SW4.2
NetX8_3: X8.3 X8.4 | length 2.5
  Top Layer w0.6: X8.4 33.274,63.886 X8.3
NetX9_3: X9.3 X9.4 | length 2.5
  Top Layer w0.6: X9.3 88.138,23.5 X9.4
NetX10_3: X10.3 X10.4 | length 2.5
  Top Layer w0.6: X10.3 38.481,23.246 X10.4
RX_1: X11.20 X20.6 | length 60.2
  Top Layer w0.24: X20.6 91.635,43.95 93.7,41.885 93.7,41.795 102.737,41.795 104.884,43.942 117.475,43.942 v1(118.364,44.831)
  Bottom Layer w0.24: v1(118.364,44.831) 118.364,39.624 121.666,36.322 139.7,36.322 X11.20
RX_1L: X19.2 X20.12 | length 99.2
  Top Layer w0.24: X19.2 2.54,16.383 2.54,20.709 5.491,23.66 15.405,23.66 18.58,26.835 v1(18.669,26.835)
  Bottom Layer w0.24: v1(18.669,26.835) 18.707,26.797 86.36,26.797 89.408,29.845 89.408,30.879 90.08,31.551 X20.12
S1: X11.13 X16.4 | length 48.1
  Bottom Layer w0.24: X11.13 139.7,28.702 139.7,26.543 140.081,26.162 143.51,26.162 143.891,26.543 143.891,60.071 X16.4
S2: X11.12 X16.3 | length 48.7
  Bottom Layer w0.24: X16.3 137.922,66.929 136.398,65.405 136.398,61.595 137.922,60.071 143.129,60.071 143.383,59.817 143.383,29.845 X11.12
SCL: X11.22 X13.2 | length 77.5
  Bottom Layer w0.24: X13.2 115.951,60.579 137.668,38.862 139.7,38.862 X11.22
SDA: X11.21 X13.1 | length 74.9
  Bottom Layer w0.24: X13.1 115.443,63.119 X11.21
Servo: X11.10 X15.1 | length 137.8
  Top Layer w0.24: X15.1@47.879,72.644 47.879,54.737 48.768,53.848 94.75,53.848 96.274,55.372 119.507,55.372 123.317,51.562 123.317,47.498 127.127,43.688 127.127,27.051 129.328,24.85 135.467,24.85 136.779,26.162 139.7,26.162 X11.10
Step1: X8.2 X11.5 | length 141.7
  Top Layer w0.24: X8.2 33.66,68.966 39.408,74.714 101.726,74.714 116.078,60.362 v1(116.078,59.436)
  Bottom Layer w0.24: v1(116.078,59.436) 117.621,57.893 117.621,39.351 137.16,19.812 X11.5
Step2: X9.2 X11.6 | length 66.3
  Top Layer w0.24: v1(101.346,12.827) v1(114.3,12.827) ; v1(122.047,12.827) 129.032,12.827 137.287,21.082 139.7,21.082 X11.6
  Bottom Layer w0.24: X9.2 88.551,18.002 96.171,18.002 v1(101.346,12.827) ; v1(114.3,12.827) v1(122.047,12.827)
Step3: X10.2 X11.24 | length 164.4
  Top Layer w0.24: X10.2 29.591,19.431 29.591,6.171 34.29,1.472 104.469,1.472 117.602,14.605 117.602,39.116 v1(122.428,43.942) ; v1(131.064,43.942) 139.7,43.942 X11.24
  Bottom Layer w0.24: v1(122.428,43.942) v1(131.064,43.942)
SW: X11.11 X16.2 | length 55.6
  Bottom Layer w0.24: X11.11 137.16,28.702 137.16,30.498 137.904,31.242 142.734,31.242 142.875,31.383 142.875,59.422 142.734,59.563 137.414,59.563 135.636,61.341 135.636,65.659 139.446,69.469 X16.2
TCRT: X11.56 X14.1 | length 96.9
  Bottom Layer w0.24: X14.1 60.266,71.687 72.738,59.215 102.216,59.215 103.505,57.926 103.505,16.143 103.646,16.002 106.68,16.002 X11.56
TX_1: X11.19 X20.5 | length 65.3
  Top Layer w0.24: X20.5 87.54,49.84 89.5,51.8 100.1,51.8 102.878,49.022 115.57,49.022 v1(119.065,45.527)
  Bottom Layer w0.24: v1(119.065,45.527) 119.133,45.459 119.133,44.867 119.253,44.747 119.253,42.418 124.206,37.465 138.303,37.465 X11.19
TX_1L: X19.1 X20.11 | length 100.9
  Top Layer w0.24: X19.1 1.778,14.605 1.778,21.717 4.161,24.1 14.321,24.1 v1(17.653,27.432)
  Bottom Layer w0.24: v1(17.653,27.432) 17.676,27.455 84.473,27.455 86.868,29.85 86.868,30.884 87.54,31.556 X20.11
VCC: C1.2 C2.2 C3.2 R1.1 X4.1 X5.3 X6.3 X7.3 X8.16 X9.16 X10.16 | length 172.3
  Top Layer w0.8: X8.16 21.194,53.801 11.759,53.801 C3.2 16.503,49.057 16.503,34.13 21.17,29.464 37.973,29.464 ; X5.3 37.959,29.478 37.973,29.464 ; X10.16 X10.16@48.751,11.241 ; X6.3 52.698,29.52 52.642,29.464 ; C1.2@55.897,18.387 C1.2 C1.2@56.099,18.295 ; X7.3 67.437,29.337 67.628,29.146 ; X4.1 67.945,7.493 67.945,12.065 ; C2.2 68.199,12.319 67.945,12.065 ; X9.16 101.854,15.051 101.854,26.94 100.249,28.545 100.249,28.67 100.074,28.845 R1.1 ; 37.973,29.464 52.642,29.464 ; 52.642,29.464 67.31,29.464 67.628,29.146 ; 67.628,29.146 67.945,28.829 67.945,12.065
  Top Layer w1: C2.2 93.345,18.034 98.298,13.081 X9.16
pads on no net: X8.8 X9.8 X10.8 X11.1 X11.2 X11.9 X11.25 X11.26 X11.27 X11.28 X11.29 X11.30 X11.31 X11.32 X11.33 X11.34 X11.35 X11.36 X11.37 X11.38 X11.39 X11.40 X11.41 X11.42 X11.43 X11.44 X11.45 X11.46 X11.47 X11.48 X11.49 X11.50 X11.51 X11.52 X11.53 X11.54 X11.61 X11.62 X11.63 X11.64 X11.65 X11.66 X11.67 X11.68 X11.69 X11.70 X11.71 X11.72 X20.1 X20.2 X20.7 X20.8

## Polygon pours and split planes (outlines as drawn)
GND on Top Layer "TOP_GND" (solid, remove dead copper, pour order 2): 0,92.586 9.525,83.061 155.067,83.061 155.067,7.623 147.447,0.003 0,0.003 0,91.951
VCC on Top Layer "VCC_L01_P001" (solid, remove dead copper, pour order 1): 53.594,23.876 51.562,25.908 33.401,25.908 31.623,27.686 31.623,32.258 34.544,35.179 68.961,35.179 78.359,25.781 78.359,18.161 75.438,15.24 71.247,15.24 71.247,4.699 69.596,3.048 65.151,3.048 65.151,7.62 56.896,15.875 53.848,15.875 50.8,12.827 50.8,10.287 48.133,10.287 46.99,11.43 47.117,11.557 47.117,17.399
GND on Bottom Layer "BOT_GND" (solid, remove dead copper, pour order 0): 0,83.32 3.302,80.018 185.547,80.018 185.547,16.391 169.418,0.262 0,0.262

## Silkscreen, mask and mechanical layers (free items; w line width, h text height)
Top Overlay:
  text "Servo" at 42.799,74.192 h2.39
  text "TCRT" at 58.899,74.192 h2.39
  text "DIR" at 34.778,70.885 h3
  text "STEP" at 34.778,68.376 h3
  text "but_2" at 41.529,61.595 h1.52
  text "but_1" at 53.213,61.595 h1.52
  text "5" at 32.4,49.724 h2.39
  text "3,3" at 61.7,49.634 h2.39
  text "MCU" at 46.3,49.424 h2.39
  text "A0" at 5.715,40.537 h2.39
  text "3v3" at 10.287,37.616 h2.39
  text "S V G" at 144.78,35.593 h3
  text "PWR" at 152.3,28.6 h2.39 r90
  text "D13" at 5.715,27.202 h2.39
  text "DIR" at 81.281,24.864 h3 r90
  text "STEP" at 83.79,24.864 h3 r90
  text "DIR" at 31.797,24.81 h3 r90
  text "STEP" at 34.306,24.81 h3 r90
  text "3v3" at 10.541,24.027 h2.39
  text "WORK" at 152.276,16 h2.39 r90
  text "Rx" at 5.588,14.097 h2.39
  text "PWR_UART" at 16.439,12.2 h2.39 r90
  text "Tx" at 5.588,11.43 h2.39
  text "3v3" at 11.3,10.324 h2.39
Mechanical 1:
  the board outline again, w0.013

## Text inside footprints (layer, text, board x,y; h text height)
X4: Top Overlay "-" at 56.471,7.493 h3 r180; Top Overlay "+" at 75.394,7.366 h3 r180
X5: Top Overlay "mini+-360" at 31.758,44.66 h2.39 r270; Top Overlay "OUT-" at 26.958,46.31 h2.39 r270; Top Overlay "OUT+" at 37.258,46.41 h2.39 r270; Top Overlay "IN-" at 27.059,36.01 h2.39 r270; Top Overlay "IN+" at 37.259,36.485 h2.39 r270
X6: Top Overlay "mini+-360" at 46.497,44.66 h2.39 r270; Top Overlay "OUT-" at 41.697,46.31 h2.39 r270; Top Overlay "OUT+" at 51.997,46.41 h2.39 r270; Top Overlay "IN-" at 41.798,36.01 h2.39 r270; Top Overlay "IN+" at 51.998,36.485 h2.39 r270
X7: Top Overlay "mini+-360" at 61.236,44.66 h2.39 r270; Top Overlay "OUT-" at 56.436,46.31 h2.39 r270; Top Overlay "OUT+" at 66.736,46.41 h2.39 r270; Top Overlay "IN-" at 56.537,36.01 h2.39 r270; Top Overlay "IN+" at 66.737,36.485 h2.39 r270